# EAGLE board Cartridge_belt (EAGLE 7.6.0)

Size 351.55 x 603.25 mm. Coordinates in mm from the lower left corner, seen from the top.
Outline: 310.12,97.74 351.54,97.74 351.51,565.12 310.15,565.15
Outline: 310.13,97.74 310.13,565.15
Outline: 0,6.35 0,596.9 arc-90 6.35,603.25 44.45,603.25 69.85,577.85 82.55,577.85 107.95,603.25 146.05,603.25 arc-90 152.4,596.9 152.4,6.35 arc-90 146.05,0 6.35,0 arc-90 0,6.35
Outline: 164.78,97.79 263.78,97.79 263.78,565.15 164.78,565.15 164.78,97.79
Outline: 16.21,536.65 19.61,536.65 19.63,459.92 16.18,459.92 16.21,536.65
Outline: 30.12,536.47 33.53,536.47 33.55,459.74 30.1,459.74 30.12,536.47
Outline: 136.19,460.3 132.79,460.3 132.77,537.03 136.22,537.03 136.19,460.3
Outline: 122.28,460.48 118.87,460.48 118.85,537.21 122.3,537.21 122.28,460.48
Copper layers (1*16): Top 0.035mm / dielectric 1.5mm / Bottom 0.035mm
Design rules "default": minimum track width 10mil, minimum drill 24mil, track to track 8mil, track to pad 8mil, pad to pad 8mil, via to via 8mil, smd to smd 8mil, copper to edge 40mil, drill to drill 8mil, minimum pad ring 10mil, minimum via ring 8mil, stop-mask expansion 4mil, vias tented up to drill 0mil, thermal gap 10mil

## Placement (x,y rotation side)
E$1  [CARTRIDGE_ESP32]  132.97,689 270 top  (outside the outline)
E$2  [ACTOBOTICS_CHANNEL_SINGLE_DRILL_REF]  0,565.15 0 top
E$3  [ACTOBOTICS_CHANNEL_SINGLE_DRILL_REF]  114.3,565.15 0 top
E$4  [ACTOBOTICS_1/2_HOLE_WITH_HUB_HOLES]  135.25,552.45 270 top
E$5  [ACTOBOTICS_1/2_HOLE_WITH_HUB_HOLES]  17.15,552.45 270 bottom
E$6  [TUBE_&_BEARING_1/2"]  55.42,565.18 80 top
E$7  [1/4"_RECT_CUT_OUT_1:1]  168.02,152.4 0 top
E$8  [GEAR_84T]  42.85,60.33 75 top
E$9  [TUBE_&_BEARING_1/2"]  58.55,42.93 45 top
E$10  [TUBE_&_BEARING_1/2"]  21.84,44.7 135 top
E$11  [ACTOBOTICS_1/2_HOLE_WITH_HUB_HOLES]  17.15,17.14 180 bottom
E$12  [ACTOBOTICS_1/2_HOLE_WITH_HUB_HOLES]  135.25,17.14 180 top
E$13  [SERVO_WITH_16T_GEAR_REF]  33.49,98.97 90 top
E$14  [1/4_RECT_CUT_OUT_REDUCED_0.993_X_0.225]  58.67,127 0 top
E$15  [1/4_RECT_CUT_OUT_REDUCED_0.993_X_0.225]  58.67,177.8 0 top
E$16  [1/4_RECT_CUT_OUT_REDUCED_0.993_X_0.225]  58.67,228.6 0 top
E$17  [1/4_RECT_CUT_OUT_REDUCED_0.993_X_0.225]  58.67,279.4 0 top
E$18  [1/4_RECT_CUT_OUT_REDUCED_0.993_X_0.225]  58.67,330.2 0 top
E$19  [1/4_RECT_CUT_OUT_REDUCED_0.993_X_0.225]  58.67,381 0 top
E$20  [1/4_RECT_CUT_OUT_REDUCED_0.993_X_0.225]  58.67,431.8 0 top
E$21  [1/4_RECT_CUT_OUT_REDUCED_0.993_X_0.225]  58.67,482.6 0 top
E$22  [1/4_RECT_CUT_OUT_REDUCED_0.993_X_0.225]  58.67,533.4 0 top
E$23  [1/4_RECT_CUT_OUT_REDUCED_0.993_X_0.225]  93.73,127 0 top
E$24  [1/4_RECT_CUT_OUT_REDUCED_0.993_X_0.225]  93.73,177.8 0 top
E$25  [1/4_RECT_CUT_OUT_REDUCED_0.993_X_0.225]  93.73,228.6 0 top
E$26  [1/4_RECT_CUT_OUT_REDUCED_0.993_X_0.225]  93.73,279.4 0 top
E$27  [1/4_RECT_CUT_OUT_REDUCED_0.993_X_0.225]  93.73,330.2 0 top
E$28  [1/4_RECT_CUT_OUT_REDUCED_0.993_X_0.225]  93.73,381 0 top
E$29  [1/4_RECT_CUT_OUT_REDUCED_0.993_X_0.225]  93.73,431.8 0 top
E$30  [1/4_RECT_CUT_OUT_REDUCED_0.993_X_0.225]  93.73,482.6 0 top
E$31  [1/4_RECT_CUT_OUT_REDUCED_0.993_X_0.225]  93.73,533.4 0 top
E$32  [END_STOP_CAP_1/2"_TUBE]  177.8,38.1 90 top
E$33  [END_STOP_CAP_1/4"_ROD]  203.2,38.1 90 top
E$34  [1/4_RECT_CUT_OUT_REDUCED_0.993_X_0.225]  194.13,127 0 top
E$35  [1/4_RECT_CUT_OUT_REDUCED_0.993_X_0.225]  194.13,177.8 0 top
E$36  [1/4_RECT_CUT_OUT_REDUCED_0.993_X_0.225]  194.13,228.6 0 top
E$37  [1/4_RECT_CUT_OUT_REDUCED_0.993_X_0.225]  194.13,279.4 0 top
E$38  [ACTOBOTICS_1/2_HOLE_WITH_HUB_HOLES]  19.05,584.2 270 bottom
E$39  [ACTOBOTICS_1/2_HOLE_WITH_HUB_HOLES]  133.35,584.2 270 top
E$44  [1/4"_RECT_CUT_OUT_1:1]  168.02,203.2 0 top
E$45  [TUBE_&_BEARING_1/2"]  96.98,565.18 80 bottom
E$46  [GEAR_84T]  109.55,60.33 75 bottom
E$47  [TUBE_&_BEARING_1/2"]  93.85,42.93 45 bottom
E$48  [TUBE_&_BEARING_1/2"]  130.56,44.7 135 bottom
E$49  [1/4"_RECT_CUT_OUT_1:1]  168.02,254 0 top
E$50  [1/4"_RECT_CUT_OUT_1:1]  168.02,304.8 0 top
E$51  [1/4"_RECT_CUT_OUT_1:1]  168.02,355.6 0 top
E$52  [1/4"_RECT_CUT_OUT_1:1]  168.02,406.4 0 top
E$53  [1/4"_RECT_CUT_OUT_1:1]  168.02,457.2 0 top
E$54  [1/4"_RECT_CUT_OUT_1:1]  168.02,508 0 top
E$55  [1/4"_RECT_CUT_OUT_1:1]  168.02,558.8 0 top
E$56  [1/4"_RECT_CUT_OUT_1:1]  168.02,101.6 0 top
E$57  [1/4"_RECT_CUT_OUT_1:1]  261.3,152.4 0 top
E$58  [1/4"_RECT_CUT_OUT_1:1]  261.3,203.2 0 top
E$59  [1/4"_RECT_CUT_OUT_1:1]  261.3,254 0 top
E$60  [1/4"_RECT_CUT_OUT_1:1]  261.3,304.8 0 top
E$61  [1/4"_RECT_CUT_OUT_1:1]  261.3,355.6 0 top
E$62  [1/4"_RECT_CUT_OUT_1:1]  261.3,406.4 0 top
E$63  [1/4"_RECT_CUT_OUT_1:1]  261.3,457.2 0 top
E$64  [1/4"_RECT_CUT_OUT_1:1]  261.3,508 0 top
E$65  [1/4"_RECT_CUT_OUT_1:1]  261.3,558.8 0 top
E$66  [1/4"_RECT_CUT_OUT_1:1]  261.3,101.6 0 top
E$67  [1/4_RECT_CUT_OUT_REDUCED_0.993_X_0.225]  194.13,330.2 0 top
E$68  [1/4_RECT_CUT_OUT_REDUCED_0.993_X_0.225]  194.13,381 0 top
E$69  [1/4_RECT_CUT_OUT_REDUCED_0.993_X_0.225]  194.13,431.8 0 top
E$70  [1/4_RECT_CUT_OUT_REDUCED_0.993_X_0.225]  194.13,482.6 0 top
E$71  [1/4_RECT_CUT_OUT_REDUCED_0.993_X_0.225]  194.13,533.4 0 top
E$72  [1/4"_RECT_CUT_OUT_1:1]  313.3,152.4 0 top
E$82  [1/4"_RECT_CUT_OUT_1:1]  313.3,203.2 0 top
E$83  [1/4"_RECT_CUT_OUT_1:1]  313.3,254 0 top
E$84  [1/4"_RECT_CUT_OUT_1:1]  313.3,304.8 0 top
E$85  [1/4"_RECT_CUT_OUT_1:1]  313.3,355.6 0 top
E$86  [1/4"_RECT_CUT_OUT_1:1]  313.3,406.4 0 top
E$87  [1/4"_RECT_CUT_OUT_1:1]  313.3,457.2 0 top
E$88  [1/4"_RECT_CUT_OUT_1:1]  313.3,508 0 top
E$89  [1/4"_RECT_CUT_OUT_1:1]  313.3,558.8 0 top
E$90  [1/4"_RECT_CUT_OUT_1:1]  313.3,101.6 0 top
E$91  [1/4"_RECT_CUT_OUT_1:1]  348.37,152.37 0 top
E$92  [1/4"_RECT_CUT_OUT_1:1]  348.37,203.17 0 top
E$93  [1/4"_RECT_CUT_OUT_1:1]  348.37,253.97 0 top
E$94  [1/4"_RECT_CUT_OUT_1:1]  348.37,304.77 0 top
E$95  [1/4"_RECT_CUT_OUT_1:1]  348.37,355.57 0 top
E$96  [1/4"_RECT_CUT_OUT_1:1]  348.37,406.37 0 top
E$97  [1/4"_RECT_CUT_OUT_1:1]  348.37,457.17 0 top
E$98  [1/4"_RECT_CUT_OUT_1:1]  348.37,507.97 0 top
E$99  [1/4"_RECT_CUT_OUT_1:1]  348.37,558.77 0 top
E$100  [1/4"_RECT_CUT_OUT_1:1]  348.37,101.57 0 top

## Library data of the parts
E$1 E$4-E$39 E$44-E$72 E$82-E$100 = uarm_alignment_base
E$2 E$3 = SparkFun-Hardware